# Altium PCB WaterGauge20260608.PcbDoc
Units mil, origin at the board's own origin, x right, y up, seen from the top; angles counter-clockwise.
Board outline 19606.3 x 2047.24 mil, 2 copper layers (Top Layer, Bottom Layer); 86 components, 78 nets, 269 pads, 255 vias.
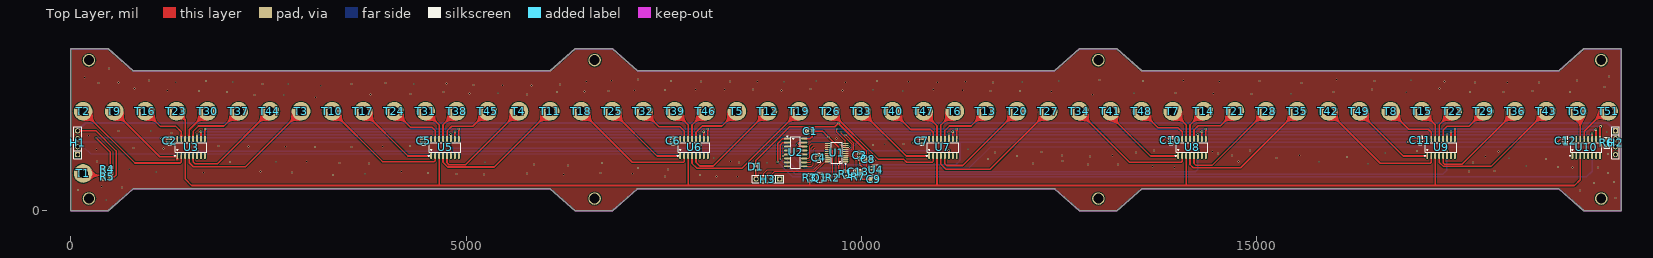
[diagram p0: Top Layer view]
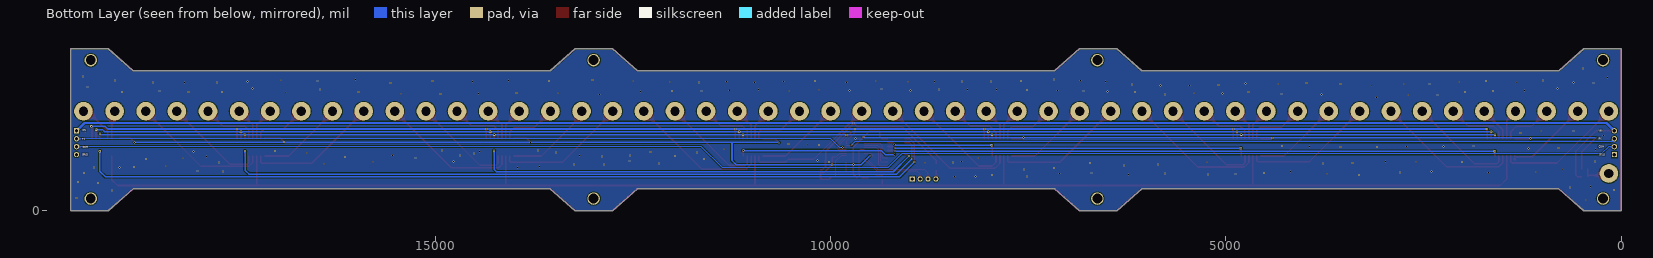
[diagram p1: Bottom Layer view, seen from below]

## Layer stack, top to bottom
Top Solder: solder mask 0.4, Solder Resist, Dk 3.5
Top Layer: signal copper 1.4
Dielectric 1: dielectric 12.6, FR-4, Dk 4.8
Bottom Layer: signal copper 1.4
Bottom Solder: solder mask 0.4, Solder Resist, Dk 3.5

## Board outline
0,0 472.44,0 787.4,275.59 6062.99,275.59 6377.95,0 6850.39,0 7165.35,275.59 12440.94,275.59 12755.91,0 13228.35,0 13543.31,275.59 18818.9,275.59 19133.86,0 19606.3,0 19606.3,2047.24 19133.86,2047.24 18818.9,1771.65 13543.31,1771.65 13228.35,2047.24 12755.91,2047.24 12440.94,1771.65 7165.35,1771.65 6850.39,2047.24 6377.95,2047.24 6062.99,1771.65 787.4,1771.65 472.44,2047.24 0,2047.24

## Design rules (kind name [scope] priority, off if disabled: settings)
Clearance [All] p1: gap=10 ignorepadtopadclearanceinfootprint=TRUE
ComponentClearance [All] p1: gap=0 collisioncheckmode=3 verticalgap=10 showdistances=FALSE
HoleSize [All] p1: absolutevalues=TRUE maxlimit=200 minlimit=1 maxpercent=80.000 minpercent=20.000
MinimumSolderMaskSliver [All] p1: minsoldermaskwidth=0
PolygonConnect [All] p1: connectstyle=Relief reliefconductorwidth=10 reliefentries=4 polygonreliefangle="90 Angle" airgapwidth=10
RoutingVias [All] p1: holewidth=12 width=24 viastyle="Through Hole" minholewidth=6 minwidth=10 maxholewidth=28 maxwidth=50
SilkToSilkClearance [All] p1: silktosilkclearance=0
SilkToSolderMaskClearance [IsPad] p1: minsilkscreentomaskgap=0 clearancetoexposedcopper=TRUE
SolderMaskExpansion [All] p1: expansion=4 istentingtop=FALSE
UnRoutedNet [All] p1: checkbadconnections=TRUE
UnpouredPolygon [All] p1: allowunpoured=TRUE allowshelved=TRUE
Width [All] p1: maxlimit=100 minlimit=1 preferedwidth=10
23 further rules are at their usual default settings.

## Components (designator, comment, footprint, x,y, rotation, side; value= is the part's Value field where it differs from the comment)
C1 "0.1uF" C0603 9348,1007 r0 top value=100nF
C2 "0.1uF" C0603 1250,884 r90 top value=100nF
C3 "0.1uF" C0603 9978,702 r90 top value=100nF
C4 "0.1uF" C0603 9458,669 r270 top value=100nF
C5 "0.1uF" C0603 4461,885 r90 top value=100nF
C6 "0.1uF" C0603 7617,886 r90 top value=100nF
C7 "0.1uF" C0603 10763,883 r90 top value=100nF
C8 "10uF" C0603 10086,648 r180 top value=100nF
C9 "10uF" C0603 10152,396 r180 top value=100nF
C10 "0.1uF" C0603 13913,888 r90 top value=100nF
C11 "0.1uF" C0603 17066,891 r90 top value=100nF
C12 "0.1uF" C0603 18904,887 r90 top value=100nF
C13 "0.1uF" C0603 9958,495 r0 top value=100nF
D1 "1n4148ws_c7420319" SOD-323_L1.7-W1.3-LS2.5-FD 8661,555 r90 top
H1 "pz254v-11-04p" HDR-TH_4P-P2.54-V-M 85,860 r90 top
H2 "pz254v-11-04p" HDR-TH_4P-P2.54-V-M 19535,860 r270 top
H3 "pz254v-11-04p" HDR-TH_4P-P2.54-V-M 8816,401 r180 top
Q1 "Q3904" SOT-23-3_L2.9-W1.6-P1.90-LS2.8-BR 9471,418 r180 top
R1 "10k" R0603 9803,464 r90 top value=1kΩ
R2 "1k" R0603 9635.4,416 r180 top value=1kΩ
R3 "10K" R0603 9344,420 r90 top value=1kΩ
R4 "frc0603f1001ts" R0805 460,525 r0 top value=1kΩ
R5 "frc0603f1001ts" R0805 460.6,430 r0 top value=1kΩ
R6 "10K" R0805 19427,861 r270 top value=1kΩ
R7 "10K" R0603 9960,429 r180 top value=1kΩ
T1 "焊盘" Contact#1 315,1018.46 r0 top
T2 "焊盘" Contact#2 980,2209.92 r0 top
T3 "焊盘" Contact#3 2910.9,1297.68 r0 top
T4 "焊盘" Contact#3 5666.81,1297.68 r0 top
T5 "焊盘" Contact#3 8422.71,1297.68 r0 top
T6 "焊盘" Contact#3 11178.62,1297.68 r0 top
T7 "焊盘" Contact#3 13934.52,1297.68 r0 top
T8 "焊盘" Contact#3 16690.43,1297.68 r0 top
T9 "焊盘" Contact#3 548.7,1297.68 r0 top
T10 "焊盘" Contact#3 3304.61,1297.68 r0 top
T11 "焊盘" Contact#3 6060.51,1297.68 r0 top
T12 "焊盘" Contact#3 8816.42,1297.68 r0 top
T13 "焊盘" Contact#3 11572.32,1297.68 r0 top
T14 "焊盘" Contact#3 14328.23,1297.68 r0 top
T15 "焊盘" Contact#3 17084.13,1297.68 r0 top
T16 "焊盘" Contact#3 942.4,1297.68 r0 top
T17 "焊盘" Contact#3 3698.31,1297.68 r0 top
T18 "焊盘" Contact#3 6454.21,1297.68 r0 top
T19 "焊盘" Contact#3 9210.12,1297.68 r0 top
T20 "焊盘" Contact#3 11966.02,1297.68 r0 top
T21 "焊盘" Contact#3 14721.93,1297.68 r0 top
T22 "焊盘" Contact#3 17477.83,1297.68 r0 top
T23 "焊盘" Contact#3 1336.1,1297.68 r0 top
T24 "焊盘" Contact#3 4092.01,1297.68 r0 top
T25 "焊盘" Contact#3 6847.91,1297.68 r0 top
T26 "焊盘" Contact#3 9603.82,1297.68 r0 top
T27 "焊盘" Contact#3 12359.72,1297.68 r0 top
T28 "焊盘" Contact#3 15115.63,1297.68 r0 top
T29 "焊盘" Contact#3 17871.53,1297.68 r0 top
T30 "焊盘" Contact#3 1729.8,1297.68 r0 top
T31 "焊盘" Contact#3 4485.71,1297.68 r0 top
T32 "焊盘" Contact#3 7241.61,1297.68 r0 top
T33 "焊盘" Contact#3 9997.52,1297.68 r0 top
T34 "焊盘" Contact#3 12753.42,1297.68 r0 top
T35 "焊盘" Contact#3 15509.33,1297.68 r0 top
T36 "焊盘" Contact#3 18265.23,1297.68 r0 top
T37 "焊盘" Contact#3 2123.5,1297.68 r0 top
T38 "焊盘" Contact#3 4879.41,1297.68 r0 top
T39 "焊盘" Contact#3 7635.31,1297.68 r0 top
T40 "焊盘" Contact#3 10391.22,1297.68 r0 top
T41 "焊盘" Contact#3 13147.12,1297.68 r0 top
T42 "焊盘" Contact#3 15903.03,1297.68 r0 top
T43 "焊盘" Contact#3 18658.93,1297.68 r0 top
T44 "焊盘" Contact#3 2517.2,1297.68 r0 top
T45 "焊盘" Contact#3 5273.11,1297.68 r0 top
T46 "焊盘" Contact#3 8029.01,1297.68 r0 top
T47 "焊盘" Contact#3 10784.92,1297.68 r0 top
T48 "焊盘" Contact#3 13540.82,1297.68 r0 top
T49 "焊盘" Contact#3 16296.73,1297.68 r0 top
T50 "焊盘" Contact#3 19052.63,1297.68 r0 top
T51 "焊盘" Contact#4 19995,1691.38 r0 top
U1 "stm32l031f6p6" TSSOP-20_L6.5-W4.4-P0.65-LS6.4-BL 9685,734 r90 top
U2 "74hc4051d,653" SOIC-16_L9.9-W3.9-P1.27-LS6.0-BL 9167,737 r270 top
U3 "74hc4051d,653" SOIC-16_L9.9-W3.9-P1.27-LS6.0-BL 1521,800 r0 top
U4 "tlv70433dbvr" SOT-23-5_L3.0-W1.7-P0.95-LS2.8-BR 10178,518 r180 top
U5 "74hc4051d,653" SOIC-16_L9.9-W3.9-P1.27-LS6.0-BL 4732,800 r0 top
U6 "74hc4051d,653" SOIC-16_L9.9-W3.9-P1.27-LS6.0-BL 7881,800 r0 top
U7 "74hc4051d,653" SOIC-16_L9.9-W3.9-P1.27-LS6.0-BL 11029,800 r0 top
U8 "74hc4051d,653" SOIC-16_L9.9-W3.9-P1.27-LS6.0-BL 14179,800 r0 top
U9 "74hc4051d,653" SOIC-16_L9.9-W3.9-P1.27-LS6.0-BL 17329,800 r0 top
U10 "74hc4051d,653" SOIC-16_L9.9-W3.9-P1.27-LS6.0-BL 19164,800 r0 top

## Footprints (in the part's own frame and the unit in brackets; to place one, negate y for a bottom-side part, rotate by r counter-clockwise, add the part's x,y. Pads: shape width x height; smd on the part's side, far side on the other; paste and mask are expansions set on the pad)
C0603 [mil]
  rect 31.5x35.4 smd: 1(-27.5,0) 2(27.6,0)
  silkscreen extent -55,-28 55,28
Contact#1 [mm]
  round 6 hole 3: 1(-4.064,-13.908)
Contact#2 [mm]
  round 6 hole 3: 1(-20.955,-24.171)
Contact#3 [mm]
  round 6 hole 3: 1(0,-1)
Contact#4 [mm]
  round 6 hole 3: 1(-13.936,-11)
HDR-TH_4P-P2.54-V-M [mil]
  rect 66.9x66.9 hole 43.3: 1(-150,0)
  round 66.9 hole 43.3: 2(-50,0) 3(50,0) 4(150,0)
  silkscreen extent -200,-50 200,50
R0603 [mil]
  rect 31.8x34 smd paste-3937 mask+2: 1(-29.6,0) 2(29.7,0)
  silkscreen extent -54,-26 55,26
R0805 [mil]
  rect 44.6x54.2 smd paste-3937 mask+2: 1(-39.3,0) 2(39.4,0)
  silkscreen extent -69,-36 69,36
SOD-323_L1.7-W1.3-LS2.5-FD [mil]
  rect 30.7x19.7 smd: 1(-40.9,0) 2(40.9,0)
  silkscreen extent -36,-31 46,31
SOIC-16_L9.9-W3.9-P1.27-LS6.0-BL [mil]
  oval 23.7x77.6 smd: 1(-175,-107.7) 2(-125,-107.7) 3(-75,-107.7) 4(-25,-107.7) 5(25,-107.7) 6(75,-107.7) 7(125,-107.7) 8(175,-107.7) 9(175,107.7) 10(125,107.7) 11(75,107.7) 12(25,107.7) 13(-25,107.7) 14(-75,107.7) 15(-125,107.7) 16(-175,107.7)
  silkscreen extent -211,-111 198,60
SOT-23-3_L2.9-W1.6-P1.90-LS2.8-BR [mil]
  rect 42.1x23.6 smd: 1(48.6,-37.4) 2(48.6,37.4) 3(-48.6,0)
  silkscreen extent -35,-61 35,61
SOT-23-5_L3.0-W1.7-P0.95-LS2.8-BR [mil]
  rect 43.3x23.6 smd: 1(51.2,-37.4) 2(51.2,0) 3(51.2,37.4) 4(-51.1,37.4) 5(-51.1,-37.4)
  silkscreen extent -35,-61 36,61
TSSOP-20_L6.5-W4.4-P0.65-LS6.4-BL [mil]
  oval 14.3x68.6 smd: 1(-115.1,-113) 2(-89.5,-113) 3(-63.9,-113) 4(-38.3,-113) 5(-12.7,-113) 6(12.8,-113) 7(38.4,-113) 8(64,-113) 9(89.6,-113) 10(115.2,-113) 11(115.2,113.1) 12(89.6,113.1) 13(64,113.1) 14(38.4,113.1) 15(12.8,113.1) 16(-12.7,113.1) 17(-38.3,113.1) 18(-63.9,113.1) 19(-89.5,113.1) 20(-115.1,113.1)
  silkscreen extent -146,-119 131,70

## Part data
C1 C2 C3 C4 C5 C6 C7 C8 C9 C10 C11 C12 C13: library part C, "容值:100nF;精度:±10%;额定电压:50V;温度系数:X7R;", JLCPCB Part Class="Extended Part", LCSC Part Name="100nF ±10% 50V", Manufacturer=SAMSUNG(三星), ManufacturerPart=CL10B104KB8NNNC, Temperature Coefficient=X7R, Tolerance=±10%, Voltage Rating=50V, AddInBom=yes, ConvertToPcb=yes, Datasheet=https://item.szlcsc.com/datasheet/CL10B104KB8NNNC/1943.html, FootprintName=C0603, ModelId=ac125912035d415993ca9572d50418b1, ModelName=C0603_L1.6-W0.8-H0.8, ModelTransform=62.992,31.496,0,0,0,0,0,0,0, Supplier=LCSC, Supplier Footprint=0603, SupplierPart=C1591, Symbol=CL10B104KB8NNNC
D1: "二极管配置:独立式;整流电流:150mA;直流反向耐压(Vr):100V;正向压降(Vf):1.25V@150mA;反向恢复时间(Trr):4ns;", Current - Rectified=150mA, JLCPCB Part Class="Extended Part", LCSC Part Name="100V 150mA", Manufacturer=R+O(宏嘉诚), ManufacturerPart=1N4148WS, Non-Repetitive Peak Forward Surge Current=2A, Operating Junction Temperature Range=-55℃~+150℃, Pd - Power Dissipation=200mW, Reverse Leakage Current (Ir)=1uA@75V, Voltage - DC Reverse(Vr)=100V, Voltage - Forward(Vf@If)=1.25V@150mA, AddInBom=yes, ConvertToPcb=yes, Datasheet=https://item.szlcsc.com/datasheet/1N4148WS/8397141.html, Diode Configuration=独立式, FootprintName=SOD-323_L1.7-W1.3-LS2.5-FD, ModelId=0f2f330c645944df9245ac3c3fec3456, ModelName=SOD-323_L1.7-W1.3-LS2.5-FD, ModelTransform=98.425,49.2125,0,180,0,0,0,0,0, Reverse Recovery Time (trr)=4ns, Supplier=LCSC, Supplier Footprint=SOD-323, SupplierPart=C7420319, Symbol=1N4148WS_C7420319
H1 H2 H3: "插针结构:1x4P;间距:2.54mm;行距:-;圆针/方针:方针;安装方式:直插;排数:单排;总PIN位数:4P;额定电流:3A;额定电压:250V;配合针长度:6mm;塑高:2.5mm;端接针长度:3mm;触头材质:-;工作温度:-40℃~+105℃;颜色:黑色;", Color=黑色, Current Rating=3A, JLCPCB Part Class="Extended Part", LCSC Part Name="1x4P 间距:2.54mm 方针 直插", Manufacturer=XFCN(兴飞), ManufacturerPart=PZ254V-11-04P, Operating Temperature=-40℃~+105℃, Voltage Rating (Max)=250V, AddInBom=yes, Circluar Pins/Square Pins=方针, Contact Material=-, ConvertToPcb=yes, Datasheet=https://item.szlcsc.com/datasheet/PZ254V-11-04P/2801085.html, FootprintName=HDR-TH_4P-P2.54-V-M, Insulation Height=2.5mm, Length of End Connection Pin=3mm, Length of Mating Pin=6mm, ModelId=112f4d05e8d64e99ab9a333894bea4f9, ModelName=HDR-TH_4P-P2.54-M-LI-1X4P, ModelTransform=399.999,104.7242,0,0,0,0,0,0,-118.11, Mounting Type=直插, Number of Pins=4P, Number of Rows=单排, Pin Structure=1x4P, Pitch=2.54mm, Row Spacing=-, Supplier=LCSC, Supplier Footprint=插件,P=2.54mm, SupplierPart=C2691448, Symbol=PZ254V-11-04P_C2691448
Q1: "晶体管类型:NPN;集电极电流(Ic):200mA;集射极击穿电压(Vceo):40V;耗散功率(Pd):225mW;直流电流增益(hFE):40@0.1mA,1.0V;", Collector - Emitter Voltage VCEO=40V, Current - Collector Cutoff=50nA, Current - Collector(Ic)=200mA, DC Current Gain=40@0.1mA,1.0V, JLCPCB Part Class="Extended Part", LCSC Part Name="NPN 电流:200mA 电压:40V", Manufacturer=onsemi(安森美), ManufacturerPart=MMBT3904LT1G, Operating Temperature=-55℃~+150℃, Pd - Power Dissipation=225mW, Transition frequency(fT)=300MHz, AddInBom=yes, ConvertToPcb=yes, Datasheet=https://item.szlcsc.com/datasheet/MMBT3904LT1G/82615.html, FootprintName=SOT-23-3_L2.9-W1.6-P1.90-LS2.8-BR, ModelId=89cb27a44ab2466697082bb9fd73a7d0, ModelName=SOT-23-3L_L2.9-W1.6-H1.1-LS2.8-P0.95, ModelTransform=114.173,110.236,0,90,0,0,0,0,0, Supplier=LCSC, Supplier Footprint=SOT-23, SupplierPart=C81464, Symbol=MMBT3904LT1G, type=NPN, Vce Saturation(VCE(sat))=200mV
R1 R2 R3 R4 R5 R6 R7: library part R, "电阻类型:厚膜电阻;阻值:1kΩ;精度:±1%;功率:100mW;工作电压:75V;温度系数:±100ppm/℃;", JLCPCB Part Class="Extended Part", LCSC Part Name="1kΩ ±1% 100mW 厚膜电阻", Manufacturer=FOJAN(富捷), ManufacturerPart=FRC0603F1001TS, Operating Temperature=-55℃~+155℃, Power(Watts)=100mW, Temperature Coefficient=±100ppm/℃, Tolerance=±1%, Voltage-Supply(Max)=75V, AddInBom=yes, ConvertToPcb=yes, FootprintName=R0603, ModelId=fc143cca1e79419f9cd78b61e9279f08, ModelName=R0603, ModelTransform=31.8897,63.7794,0,90,0,0,0,0,0, Supplier=LCSC, Supplier Footprint=0603, SupplierPart=C2907002, Symbol=FRC0603F1001TS, type=厚膜电阻
T1 T2 T3 T4 T5 T6 T7 T8 T9 T10 T11 T12 T13 T14 T15 T16 T17 T18 T19 T20 T21 T22 T23 T24 T25 T26 T27 T28 T29 T30 T31 T32 T33 T34 T35 T36 T37 T38 T39 T40 T41 T42 T43 T44 T45 T46 T47 T48 T49 T50 T51: library part PAD
U1: "CPU内核:-;CPU最大主频:32MHz;", JLCPCB Part Class="Extended Part", LCSC Part Name="超低功耗Arm Cortex-M0+ MCU，具有32-KB Flash存储器和32 MHz CPU", Manufacturer=ST(意法半导体), ManufacturerPart=STM32L031F6P6, Voltage - Supply=1.8V~3.6V, ADC (Bit)=12bit, AddInBom=yes, ConvertToPcb=yes, CPU Core=-, CPU Maximum Speed=32MHz, Datasheet=https://item.szlcsc.com/datasheet/STM32L031F6P6/116454.html, FootprintName=TSSOP-20_L6.5-W4.4-P0.65-LS6.4-BL, ModelId=c491f68934b34c649df5890a1d97cd0f, ModelName=TSSOP-20_L6.5-W4.4-H1.0-LS6.4-P0.65, ModelTransform=251.969,255.906,0,90,0,0,0.0005,0,0, Number of I/O=15, Program Memory Type=FLASH, Program Storage Size=32KB, Supplier=LCSC, Supplier Footprint=TSSOP-20, SupplierPart=C115208, Symbol=STM32L031F6P6
U2 U3 U5 U6 U7 U8 U9 U10: "开关电路:8:1;通道数:1;导通电阻(Ron):80Ω;", JLCPCB Part Class="Extended Part", LCSC Part Name=8通道模拟多路复用器/解复用器, Manufacturer=Nexperia(安世), ManufacturerPart=74HC4051D,653, Operating Temperature=-40℃~+125℃, Voltage - Supply=2V~10V, AddInBom=yes, Bandwidth=-, Con=-, ConvertToPcb=yes, Datasheet=https://item.szlcsc.com/datasheet/74HC4051D%252C653/9915.html, Features=电平转换, FootprintName=SOIC-16_L9.9-W3.9-P1.27-LS6.0-BL, ModelId=c21ec766ec2643efb3352f8441994f4e, ModelName=SOIC-16_L9.9-W3.9-H1.8-LS6.0-P1.27, ModelTransform=389.763,236.454,0,0,0,0,0,0,0, Number of Channels=1, Propagation Delay (tpd)=5ns, Ron=80Ω, Supplier=LCSC, Supplier Footprint=SOIC-16, SupplierPart=C9386, Switch Circuit=8:1, Symbol=74HC4051D,653, Turn-off time=31ns, Turn-on time=29ns
U4: "输出极性:正极;工作电压:24V;输出电压:3.3V;输出电流:150mA;电源纹波抑制比(PSRR):60dB@(100kHz);输出类型:固定;", JLCPCB Part Class="Extended Part", LCSC Part Name="3.3V 150mA 24V", Manufacturer=TI(德州仪器), ManufacturerPart=TLV70433DBVR, Operating Temperature=-40℃~+125℃@(Tj), Output Current=150mA, Output Voltage=3.3V, Power Supply Rejection Ratio (PSRR)=60dB@(100kHz), standby current=3.2uA, Voltage - Supply=24V, Voltage Dropout=850mV@(100mA), AddInBom=yes, ConvertToPcb=yes, Datasheet=https://www.ti.com/cn/lit/ds/symlink/tlv704.pdf, Features=短路保护；过流保护；使能控制, FootprintName=SOT-23-5_L3.0-W1.7-P0.95-LS2.8-BR, ModelId=0a2a1b8f50944f73965918ad6e5fe167, ModelName=SOT-23-5_L2.9-W1.6-H1.1-LS2.8-P0.95, ModelTransform=114.173,109.636,0,180,0,0,0,0,0, Noise=-, Number of Outputs=1, Output Configuration=正极, Output Type=固定, Supplier=LCSC, Supplier Footprint=SOT-23-5, SupplierPart=C94917, Symbol=TLV70433DBVR

## Free pads (board coordinates)
  round 157.48 hole 125.98: 0(229.33,153.86) 0(229.33,1903.86) 0(6624.33,153.86) 0(6624.33,1903.86) 0(12994.33,153.86) 0(12994.33,1903.86) 0(19354.33,153.86) 0(19354.33,1903.86)

## Via types
v1: diameter 24, hole 12, Top Layer to Bottom Layer, 227 vias
v2: diameter 30, hole 16, Top Layer to Bottom Layer, 28 vias

## Nets (pads, with @x,y where several pads share a name; then routed paths per layer and width w, separated by ;. In a path a pad name is that pad's centre, name@x,y a point inside that pad or via, vN(x,y) a via of type N, cw(c..) or ccw(c..) an arc to the next point about the centre after c; other vN are vias at no path point)
3.3V: C1.2 C2.2 C3.1 C4.1 C5.2 C6.2 C7.2 C9.2 C10.2 C11.2 C12.2 R2.1 R4.2 R7.1 U1.5 U1.16 U2.16 U3.16 U4.3 U5.16 U6.16 U7.16 U8.16 U9.16 U10.16 | length 23299.7
  Top Layer w10: C4.1@9459.95,696.5 9484.45,721 9571.6,721 U1.16 ; U1.5 9885.7,721.3 9932,675 9977.5,675 C3.1
  Top Layer w20: v1(321,921) 499.4,742.6 R4.2 ; v1(1145,915) 1146.08,915 1149.48,911.6 C2.2 1344.29,911.6 1346,909.89 U3.16 ; v1(4407,921) 4415.4,912.6 C5.2 4555.29,912.6 4557,910.89 U5.16 ; v1(7559,924) 7572.23,910.77 7614.17,910.77 C6.2 7704.29,913.6 7706,911.89 U6.16 ; U2.16 9352,912 9375.6,935.6 C1.2 9505,1007 v1(9582,930) 9710,802 v1(9710,583) 9710,462.1 9665,417.1 R2.1 ; C4.1 9459.95,696.5 9498.42,696.5 9501.92,693 v1(9503,693) ; C3.1 9978.5,674 9978.5,583.5 v1(9979,583) 10018.77,543.23 10079.6,482.4 10125,482.4 U4.3 10125.6,479.4 10125.6,397.2 C9.2 10022.6,396 9996.6,422 9995.5,422 9989.6,427.9 R7.1 ; v1(10650,860) 10700.6,910.6 C7.2 10764.45,909.15 10852.55,909.15 U7.16 ; v1(13793,866) 13842.6,915.6 C10.2 14002.29,915.6 14004,913.89 U8.16 ; v1(16908,867) 16959.6,918.6 C11.2 17152.29,918.6 17154,916.89 U9.16 ; v1(18800,865) 18849.6,914.6 C12.2 18987.29,914.6 18989,912.89 U10.16
  Bottom Layer w20: v1(321,921) 1139,921 v1(1145,915) 1154,924 v1(7559,924) 9574.92,924 9580.92,930 v1(9582,930) ; v1(9503,693) 9613,583 v1(9710,583) v1(9979,583) 11192,583 11245,636 11245,865 ; v1(10650,860) 10651.08,860 10656.08,865 11245,865 ; v1(18800,865) 11245,865
A0: U1.6 U3.11 U5.11 U6.11 U7.11 U8.11 U9.11 U10.11 | length 18392.4
  Top Layer w10: U1.6 9872.8,746.8 9902,776 9902,856 v1(9798,960)
  Top Layer w20: U3.11 v2(1596,963) v2@1596,965.71 ; v2(4805,963) 4806.29,961.71 4806.29,908.41 U5.11 ; U6.11 v2(7956,963) ; U7.11 11104.5,908.2 11104.5,962.5 v2(11105,963) ; v2(14253,963) 14253.5,962.5 14253.5,908.2 U8.11 ; U9.11 v2(17404,962) ; v2(19238,974) 19238.5,973.5 19238.5,908.2 U10.11
  Bottom Layer w20: v2(1596,963) 1597,962 v2(17404,962) 19226,962 v2(19238,974)
A1: U1.7 U3.10 U5.10 U6.10 U7.10 U8.10 U9.10 U10.10 | length 18674.6
  Top Layer w10: v1(9739,999) 9740,998 9740,979 9880,839 9880,783 9869.4,772.4 U1.7
  Top Layer w20: v2(1645,998) 1646,997 U3.10 ; U5.10 4857.5,908.2 4857.5,996.5 v2(4858,997) ; v2(8005,997) 8005.5,996.5 8005.5,908.2 U6.10 ; U7.10 v2(11154,998) ; U8.10 v2(14304,998) ; U9.10 v2(17454,998) ; v2(19287,1026) 19288.29,1024.71 19288.29,908.41 U10.10
  Bottom Layer w20: v2(1645,998) v2(11154,998) v2(14304,998) v2(17454,998) 19179,998 19207,1026 v2(19287,1026)
A2: U1.10 U3.9 U5.9 U6.9 U7.9 U8.9 U9.9 U10.9 | length 18811.7
  Top Layer w10: v1(9688,1032) 9688,990 9792.7,885.3 9792.7,851.19 9794.69,849.2 U1.10
  Top Layer w20: U3.9 1696,987 1696.09,987.09 1696.09,1028.09 1698,1030 v2(1698,1033) ; U5.9 v2(4907,1033) ; U6.9 v2(8056,1033) ; v2(11204,1034) U7.9 U7.9@11205.7,907.7 ; U8.9 v2(14354,1034) ; U9.9 17504.5,908.2 17504.5,1033.5 v2(17505,1034) ; U10.9 19339,1056.29 19346,1063.29 v2(19346,1066)
  Bottom Layer w20: v2(1698,1033) v2(4907,1033) v2(8056,1033) 19140,1033 19174,1067 19345,1067 v2(19346,1066)
COM: H1.2 H2.3 R6.2 | length 19785.7
  Top Layer w10: R6.2 19438.6,810 H2.3
  Bottom Layer w10: H1.2 157,810 249,718 9097,718 9274,541 11364,541 11633,810 H2.3
CONT: R3.1 U3.3 U5.3 U6.3 U7.3 U8.3 U9.3 U10.3 | length 20241.3
  Top Layer w20: U3.3 1446,400 1527,319 4656,319 ; U5.3 4657,320 4656,319 ; U6.3 7806,320 7805,319 ; R3.1 9344,322 9341,319 ; U7.3 10954,321 10952,319 ; U8.3 14104,321 14106,319 ; U9.3 17254,321 17256,319 ; U10.3 19089,393 19015,319 17256,319 ; 4656,319 7805,319 ; 7805,319 9341,319 ; 9341,319 10952,319 ; 10952,319 14106,319 ; 14106,319 17256,319
EN_0: U2.13 U3.6 | length 7742
  Top Layer w20: U3.6 1596.71,693.01 1596.71,747.71 1597,748 v2(1597,752) ; v1(9184,752) 9185.08,752 9195.08,762 U2.13
  Bottom Layer w20: v2(1597,752) v1(9184,752)
EN_1: U2.14 U5.6 | length 4573.9
  Top Layer w20: U5.6 4807,789 v2(4808,790) ; v1(9186,794) 9187.08,794 9205.08,812 U2.14
  Bottom Layer w20: v2(4808,790) 9182,790 v1(9186,794)
EN_2: U2.15 U6.6 | length 1468.1
  Top Layer w20: U6.6 7956,827 v2(7958,829) ; v1(9190.52,841.02) 9193.11,841.02 9213.37,861.29 9273.99,861.29 U2.15
  Bottom Layer w20: v2(7958,829) 9178.81,829 9190.52,840.72 v1(9190.52,841.02)
EN_3: U2.12 U7.6 | length 2083.4
  Top Layer w20: v1(9193,710) 9194.08,710 9196.08,712 U2.12 ; U7.6 v2(11104,761)
  Bottom Layer w20: v1(9193,710) 9306.79,710 9357.79,761 v2(11104,761)
EN_4: U2.5 U8.6 | length 5704.6
  Top Layer w20: v1(9007,691) 9007.77,691.77 9011.11,691.77 9031.35,712 U2.5 ; U8.6 v2(14254,760)
  Bottom Layer w20: v1(9007,691) 9204,494 14222,494 14254,526 v2(14254,760)
EN_5: U2.2 U9.6 | length 9115.4
  Top Layer w20: v1(8971,655) 8971,831.55 9001.45,862 U2.2 ; v2(17403,755) 17403,751 17404,750 U9.6
  Bottom Layer w20: v1(8971,655) 9163,463 17354,463 17403,512 v2(17403,755)
EN_6: U2.1 U10.6 | length 11099.1
  Top Layer w20: v1(8939,617) 8939,849.55 9001.45,912 U2.1 ; U10.6 v2(19239,752)
  Bottom Layer w20: v1(8939,617) 9128,428 19168,428 19239,499 v2(19239,752)
GND: C1.1 C2.1 C3.2 C4.2 C5.1 C6.1 C7.1 C8.1 C9.1 C10.1 C11.1 C12.1 C13.2 H1.1 H2.4 H3.1 pad.0@6624.33,153.86 Q1.2 R1.1 U1.15 U2.3 U2.6 U2.7 U2.8 U3.7 U3.8 U4.1 U5.7 U5.8 U6.7 U6.8 U7.7 U7.8 U8.7 U8.8 U9.7 U9.8 U10.7 U10.8
  other v1: 448,134 19533,162 19084,255 93,264 646,295 391,306 19262,352 19516,364 8429,429 8163,431 7514,434 3314,453 7956,453 5227,458 6234,460 4876,465 3722,467 7105,467 5768,469 4518,475 6697,475 19440,478 1678,480 2796,485 1080,491 2397,495 4178,496 17681,497 18002,502 7554,520 739,524 7172,542 13954,548 18991,549 19312,549 18805,552 13683,560 18406,568 6285,571 5857,582 13245,584 12866,587 16404,594 3773,595 12170,599 3398,604 6719,604 8804,606 17731,611 8448,612 5236,613 10017,616 2014,617 2595,619 15785,619 331,622 2984,622 14767,622 8340,626 12543,629 10163,634 11597,653 18658,654 18190,663 15249,665 8131,666 16138,680 17888,685 12887,687 11968,690 13170,696 14685,698 12534,699 15540,702 19438,718 14509,724 16623,728 11687,735 13469,735 12278,741 18056,747 14435,748 17022,756 13698,762 14912,764 322,774 11344,777 1173,787 790,791 3088,807 3550,807 2715,809 2248,811 3945,812 1866,816 4288,816 10146,831 10293,840 10530,842 9681,913 222,948 1272,984 19424,996 604,1006 1011,1008 3095,1435 2324,1465 2693,1465 12923,1467 3791,1470 5771,1470 4295,1474 14933,1476 15431,1479 5041,1481 14448,1482 5401,1485 13447,1485 13969,1488 16889,1498 4712,1499 6146,1499 17693,1500 18116,1500 18960,1500 1974,1503 15970,1503 6498,1510 12399,1510 11630,1512 12004,1512 18487,1512 6802,1514 10521,1514 1623,1516 1219,1518 8985,1518 9757,1521 7129,1523 11279,1523 7516,1527 10145,1530 8270,1532 8628,1532 10906,1532 16455,1533 7903,1534 9352,1541 806,1545 17307,1548 19395,1565 3161,1580 5824,1583 5459,1587 5094,1591 6184,1598 3548,1603 2423,1605 2750,1605 4337,1605 4752,1607 352,1615 15563,1615 3979,1616 17757,1619 18166,1619 18568,1619 604,1622 11664,1622 1327,1625 9799,1625 10961,1625 2048,1627 12032,1629 9021,1631 10592,1631 11315,1631 14523,1633 7967,1634 17372,1634 6518,1636 8338,1636 8681,1636 1709,1638 9427,1638 16485,1639 10196,1640 7591,1642 12494,1642 13559,1642 15033,1642 6838,1644 19048,1645 987,1647 14068,1648 16946,1650 13010,1651 7172,1660 16009,1660 176,1687 19452,1698 483,1801
GPIO_IN: Q1.3 R2.2 U1.14 | length 514.8
  Top Layer w10: U1.14 9625.74,772.4 9637,761.14 9637,448.4 9605.7,417.1 R2.2
  Top Layer w20: Q1.3 9528.85,418 9530.85,416 R2.2
H1: T2.1 U3.2 | length 1594.9
  Top Layer w20: T2.1 810.31,603 1384.28,603 1396,614.72 U3.2
H2: T9.1 U3.1 | length 1045.3
  Top Layer w20: T9.1 1125.01,682 1344.29,682 1346,683.71 U3.1
H3: T16.1 U3.15 | length 652.3
  Top Layer w20: T16.1 1134.71,1066 1329,1066 1396,999 U3.15
H4: T23.1 U3.14 | length 396.1
  Top Layer w20: T23.1 1446,1148.41 U3.14
H5: T30.1 U3.13 | length 447.5
  Top Layer w20: U3.13 1496,1024.5 T30.1
H6: T37.1 U3.12 | length 778.6
  Top Layer w20: U3.12 1546,1003 1614,1071 1936.2,1071 T37.1
H7: T44.1 U3.5 | length 1330.8
  Top Layer w20: U3.5 1546,620.48 1574.48,592 1850.9,592 T44.1
H8: T3.1 U3.4 | length 1811.6
  Top Layer w20: U3.4 1496,608 1548,556 2208.6,556 T3.1
H9: T10.1 U5.2 | length 1630.8
  Top Layer w20: T10.1 3941.91,621 4595.28,621 4607,632.72 U5.2
H10: T17.1 U5.1 | length 1093.1
  Top Layer w20: T17.1 4264.31,692.3 U5.1
H11: T24.1 U5.15 | length 723.1
  Top Layer w20: T24.1 4297.31,1053 4569,1053 4607,1015 U5.15
H12: T31.1 U5.14 | length 421.6
  Top Layer w20: T31.1 4657,1087.01 U5.14
H13: T38.1 U5.13 | length 422
  Top Layer w20: U5.13 4707,1085.9 T38.1
H14: T45.1 U5.12 | length 719.5
  Top Layer w20: U5.12 4757.71,908.41 4757.71,1007.71 4818,1068 5082.8,1068 T45.1
H15: T4.1 U5.5 | length 1285.4
  Top Layer w20: U5.5 4757,606 4780,583 4991.5,583 T4.1
H16: T11.1 U5.4 | length 1749.5
  Top Layer w20: U5.4 4707,613.57 4767.57,553 5355.2,553 T11.1
H17: T18.1 U6.2 | length 1642.9
  Top Layer w20: T18.1 7100.52,612 7744.28,612 7756,623.72 U6.2
H18: T25.1 U6.1 | length 1092.5
  Top Layer w20: T25.1 7413.92,692.3 U6.1
H19: T32.1 U6.15 | length 717.8
  Top Layer w20: T32.1 7435.92,1064 7699,1064 7756,1007 U6.15
H20: T39.1 U6.14 | length 421.3
  Top Layer w20: T39.1 7806,1087.62 U6.14
H21: T46.1 U6.13 | length 422.3
  Top Layer w20: U6.13 7856,1085.29 T46.1
H22: T5.1 U6.12 | length 711.3
  Top Layer w20: U6.12 7906,992 7985,1071 8234,1071 8421.31,1258.31 T5.1
H23: T12.1 U6.5 | length 1296.5
  Top Layer w20: U6.5 7906,612 7952,566 8124.11,566 T12.1
H24: T19.1 U6.4 | length 1773.1
  Top Layer w20: U6.4 7856,598.29 7918.29,536 8487.81,536 T19.1
H25: T26.1 U7.2 | length 1641.3
  Top Layer w20: T26.1 10208.72,653.4 10529.8,653.4 10571.2,612 10892.28,612 10904,623.72 U7.2
H26: T33.1 U7.1 | length 1090.9
  Top Layer w20: T33.1 10563.52,692.3 U7.1
H27: T40.1 U7.15 | length 709.4
  Top Layer w20: T40.1 10622.53,1027 10871,1027 10905,993 10905,976.43 10904.71,976.14 10904.71,908.41 U7.15
H28: T47.1 U7.14 | length 420.6
  Top Layer w20: T47.1 10784.92,1243.08 10954,1074 U7.14
H29: T6.1 U7.13 | length 422.9
  Top Layer w20: U7.13 11004,1083.69 T6.1
H30: T13.1 U7.12 | length 725.8
  Top Layer w20: U7.12 11054,1014 11111,1071 11385,1071 T13.1
H31: T20.1 U7.5 | length 1304.3
  Top Layer w20: U7.5 11054,593 11075,572 11279.71,572 T20.1
H32: T27.1 U7.4 | length 1792.1
  Top Layer w20: U7.4 11004,587 11068,523 11624.41,523 T27.1
H33: T34.1 U8.2 | length 1644
  Top Layer w20: T34.1 12753.42,1249.58 13389,614 14042.28,614 14054,625.72 U8.2
H34: T41.1 U8.1 | length 1125.6
  Top Layer w20: T41.1 13147.12,1199.88 13654.7,692.3 U8.1
H35: T48.1 U8.15 | length 711.3
  Top Layer w20: T48.1 13752.13,1047 14005,1047 14054,998 U8.15
H36: T7.1 U8.14 | length 420.8
  Top Layer w20: T7.1 14104,1088.83 U8.14
H37: T14.1 U8.13 | length 422.8
  Top Layer w20: U8.13 14154,1084.08 T14.1
H38: T21.1 U8.12 | length 730.1
  Top Layer w20: U8.12 14204,1022 14257,1075 14538.62,1075 T21.1
H39: T28.1 U8.5 | length 1300.1
  Top Layer w20: U8.5 14204,598 14229,573 14430.32,573 T28.1
H40: T35.1 U8.4 | length 1776.3
  Top Layer w20: U8.4 14154,585 14196,543 14794.02,543 T35.1
H41: T42.1 U9.2 | length 1656.9
  Top Layer w20: T42.1 16560.33,601 17191,601 17204,614 U9.2
H42: T49.1 U9.1 | length 1098.8
  Top Layer w20: T49.1 16296.73,1246.27 16850.7,692.3 U9.1
H43: T8.1 U9.15 | length 708.8
  Top Layer w20: T8.1 16918.74,1030 17167,1030 17204,993 U9.15
H44: T15.1 U9.14 | length 421
  Top Layer w20: T15.1 17254,1088.44 U9.14
H45: T22.1 U9.13 | length 422.6
  Top Layer w20: U9.13 17304,1084.48 T22.1
H46: T29.1 U9.12 | length 727.4
  Top Layer w20: U9.12 17354,1018 17405,1069 17682.22,1069 T29.1
H47: T36.1 U9.5 | length 1280.7
  Top Layer w20: U9.5 17354,606.43 17370.43,590 17596.93,590 T36.1
H48: T43.1 U9.4 | length 1744.8
  Top Layer w20: U9.4 17304,614 17358,560 17960.63,560 T43.1
H49: T50.1 U10.14 | length 365.7
  Top Layer w20: T50.1 19088.29,1222.65 19088.29,908.41 U10.14
H50: T51.1 U10.13 | length 510.1
  Top Layer w20: U10.13 19139,1006 19391.31,1258.31 T51.1
NetD1_1: D1.1 H3.4 | length 115.2
  Top Layer w20: D1.1 8661.15,513.95 8661.15,405.85 H3.4
NetQ1_1: Q1.1 R3.2 | length 80.8
  Top Layer w20: R3.2 9347.9,453.6 9420.6,453.6 Q1.1
NetR1_2: R1.2 U1.1 | length 127.3
  Top Layer w10: U1.1 9798,498.7 R1.2
NetR4_1: R4.1 R5.1 T1.1 | length 375.7
  Top Layer w20: T1.1 178.81,447.1 409,447.1 R5.1@421,435.1 ; R4.1 421,524.7 R5.1@421,435.1 ; R5.1@421,430.3 R5.1@421,435.1
NRST: C13.1 R7.2 U1.4 | length 361.1
  Top Layer w10: U1.4 9865.3,695.7 9930.5,630.5 C13.1 9930.5,429.2 R7.2
SELECT_EN0: U1.11 U2.11 | length 459.7
  Top Layer w10: U2.11 9330,662 9342,674 9342,819 9372.2,849.2 U1.11
SELECT_EN1: U1.12 U2.10 | length 482.7
  Top Layer w10: U2.10 9350,612 9364,626 9364,793 9394.6,823.6 U1.12
SELECT_EN2: U1.13 U2.9 | length 506.3
  Top Layer w10: U2.9 9369,562 9386,579 9386,769 9415,798 U1.13
SWCLK: H3.2 U1.20 | length 831.3
  Top Layer w10: H3.2 8866,461 8901,496 9410,496 9532.9,618.9 U1.20
SWDIO: H3.3 U1.19 | length 949.5
  Top Layer w10: H3.3 8766,474 8808,516 9398,516 9504,622 9526.5,644.5 U1.19
USART2_RX: H1.3 U1.9 | length 9748.8
  Top Layer w10: v1(9730.63,831.63) 9734.42,831.63 9742.44,823.6 U1.9
  Bottom Layer w10: H1.3 125,870 9692.25,870 v1(9730.63,831.63)
USART2_TX: H2.2 R6.1 U1.8 | length 9895.7
  Top Layer w10: U1.8 9798.7,798.7 9848.3,798.7 v1(9849,799.4) ; R6.1 19436.7,910 H2.2
  Bottom Layer w10: v1(9849,799.4) 9849.4,799 9883,799 9994,910 H2.2
VIN: C8.2 D1.2 H1.4 H2.1 R5.2 U4.2 | length 22567.9
  Top Layer w20: H1.4 317,1010 572,755 572,451 551,430 R5.2 ; D1.2 8661,636 9088,1063 9662,1063 v1(9706,1107) 9706,1106 10058.4,753.6 C8.2 10062,644.4 10062,558.47 10100.67,519.8 10125,519.8 U4.2
  Bottom Layer w30: H1.4 185,1110 19435,1110 19516.55,1028.45 H2.1
pads on no net: U1.2 U1.3 U1.17 U1.18 U2.4 U4.4 U4.5 U10.1 U10.2 U10.4 U10.5 U10.12 U10.15

## Polygon pours and split planes (outlines as drawn)
GND on Top Layer "TOP_GND" (solid, remove dead copper, pour order 0): -344,2287 -344,-212 19747,-212 19747,2320 16327,2320
GND on Bottom Layer "BOTTOM_GND" (solid, remove dead copper, pour order 1): -245,2238 19764,2238 19764,-212 -229,-212

## Keep-outs
Keep-Out Layer:
  the board outline again, w10

## Silkscreen, mask and mechanical layers (free items; w line width, h text height)
Bottom Overlay:
  text "VIN" at 19459,1008 h20
  text "VIN" at 285,997 h20
  text "RX" at 283,900 h20
  text "TX" at 19460,890 h20
  text "COM" at 281,799 h20
  text "COM" at 19457,793 h20
  text "GND" at 274,698 h20
  text "GND" at 19462,698 h20